# Altium PCB kardio (1).pcbdoc
Units mm, origin at the board's own origin, x right, y up, seen from the top; angles counter-clockwise.
Board outline 75 x 75 mm, 2 copper layers (Top Layer, Bottom Layer); 36 components, 33 nets, 151 pads, 22 vias.
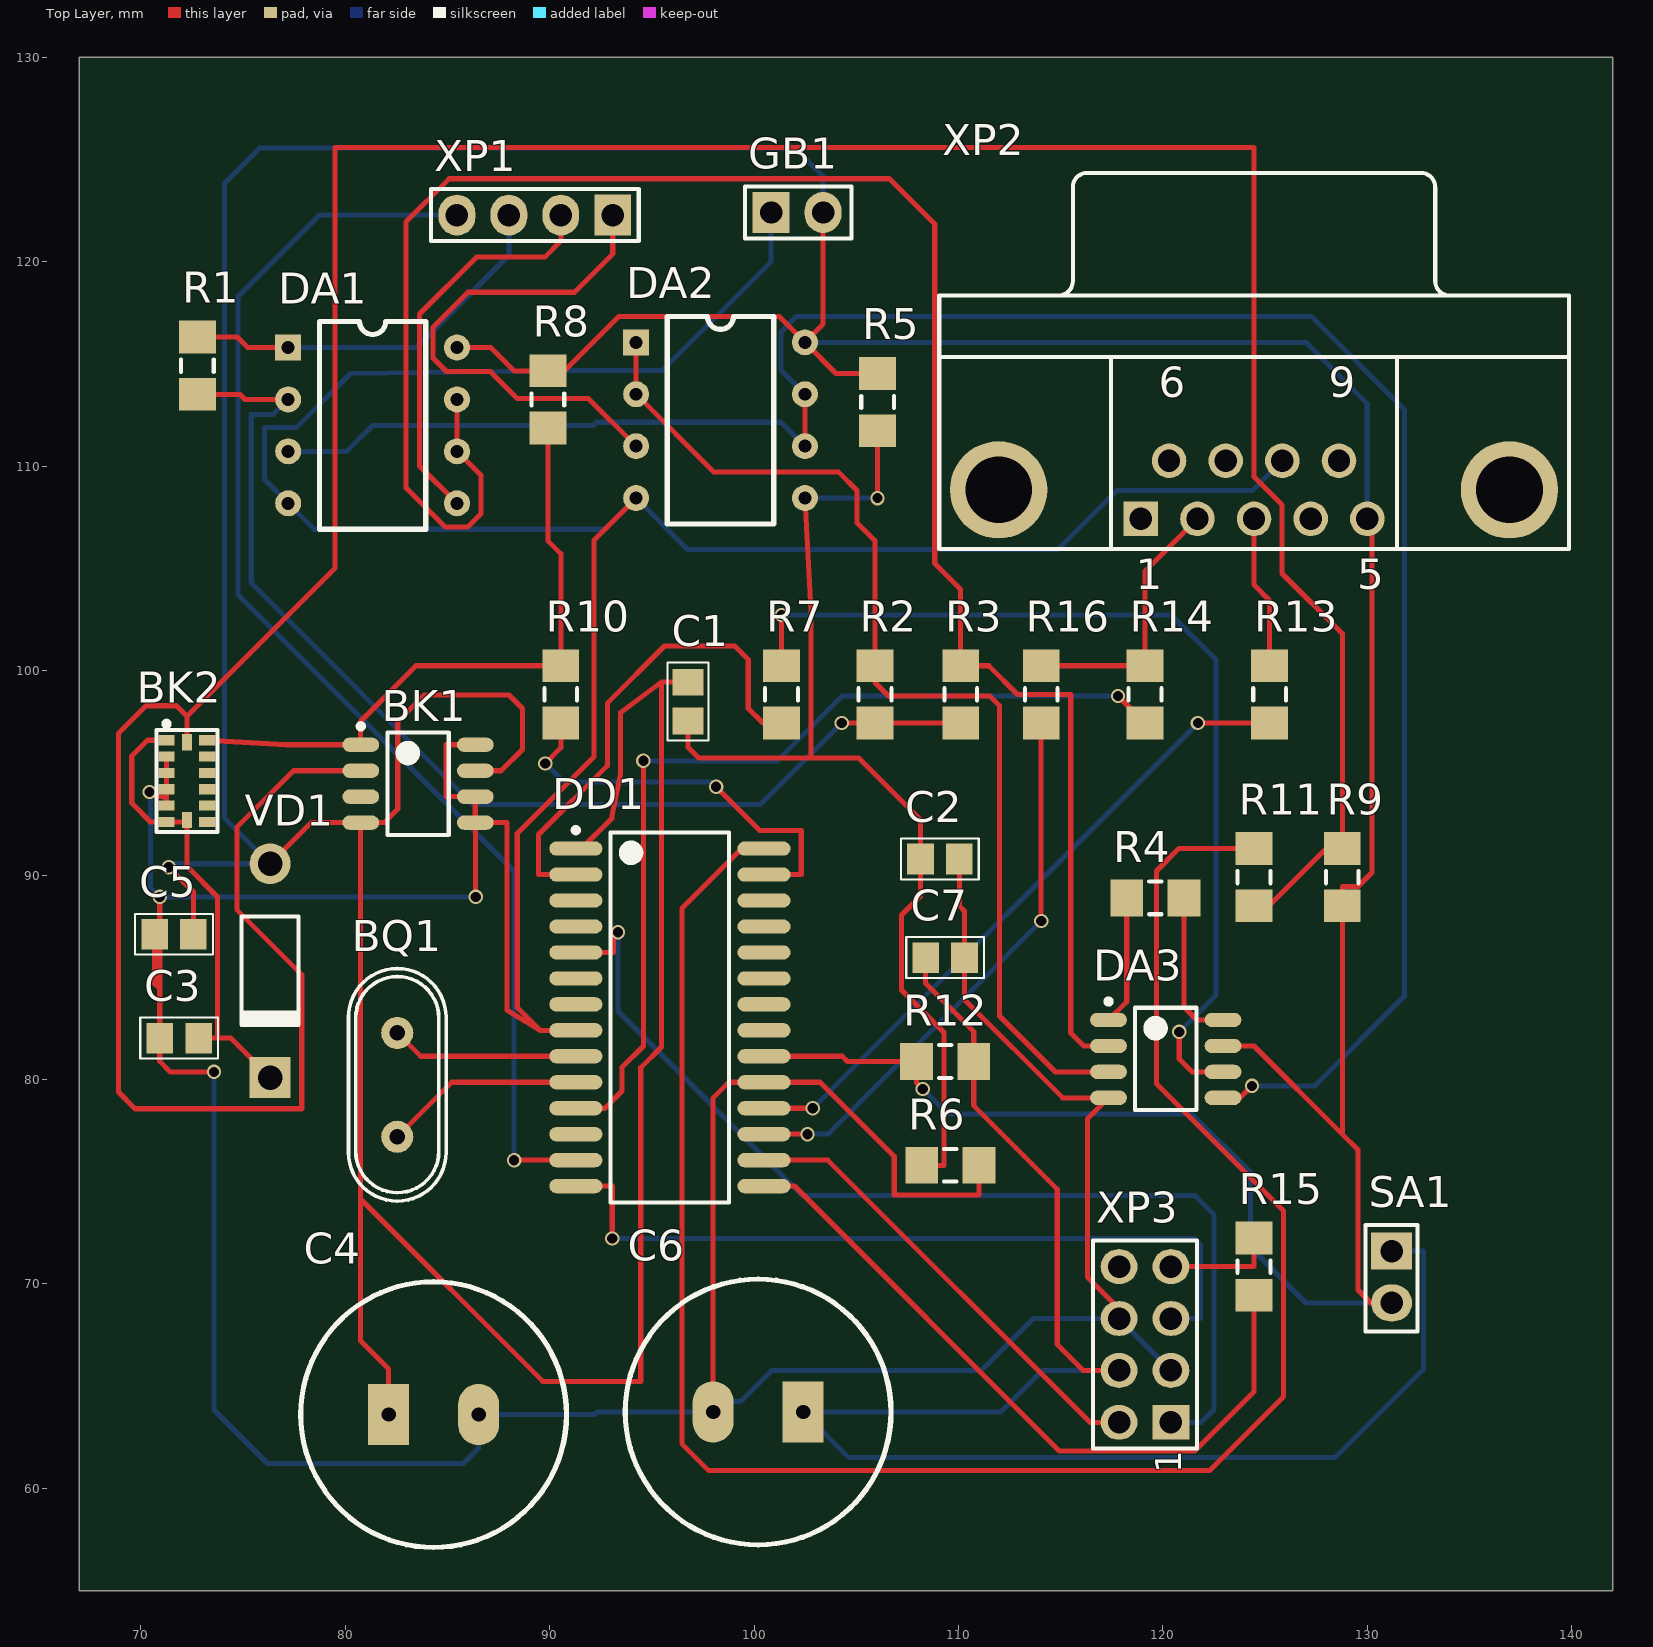
[diagram p0: Top Layer view]
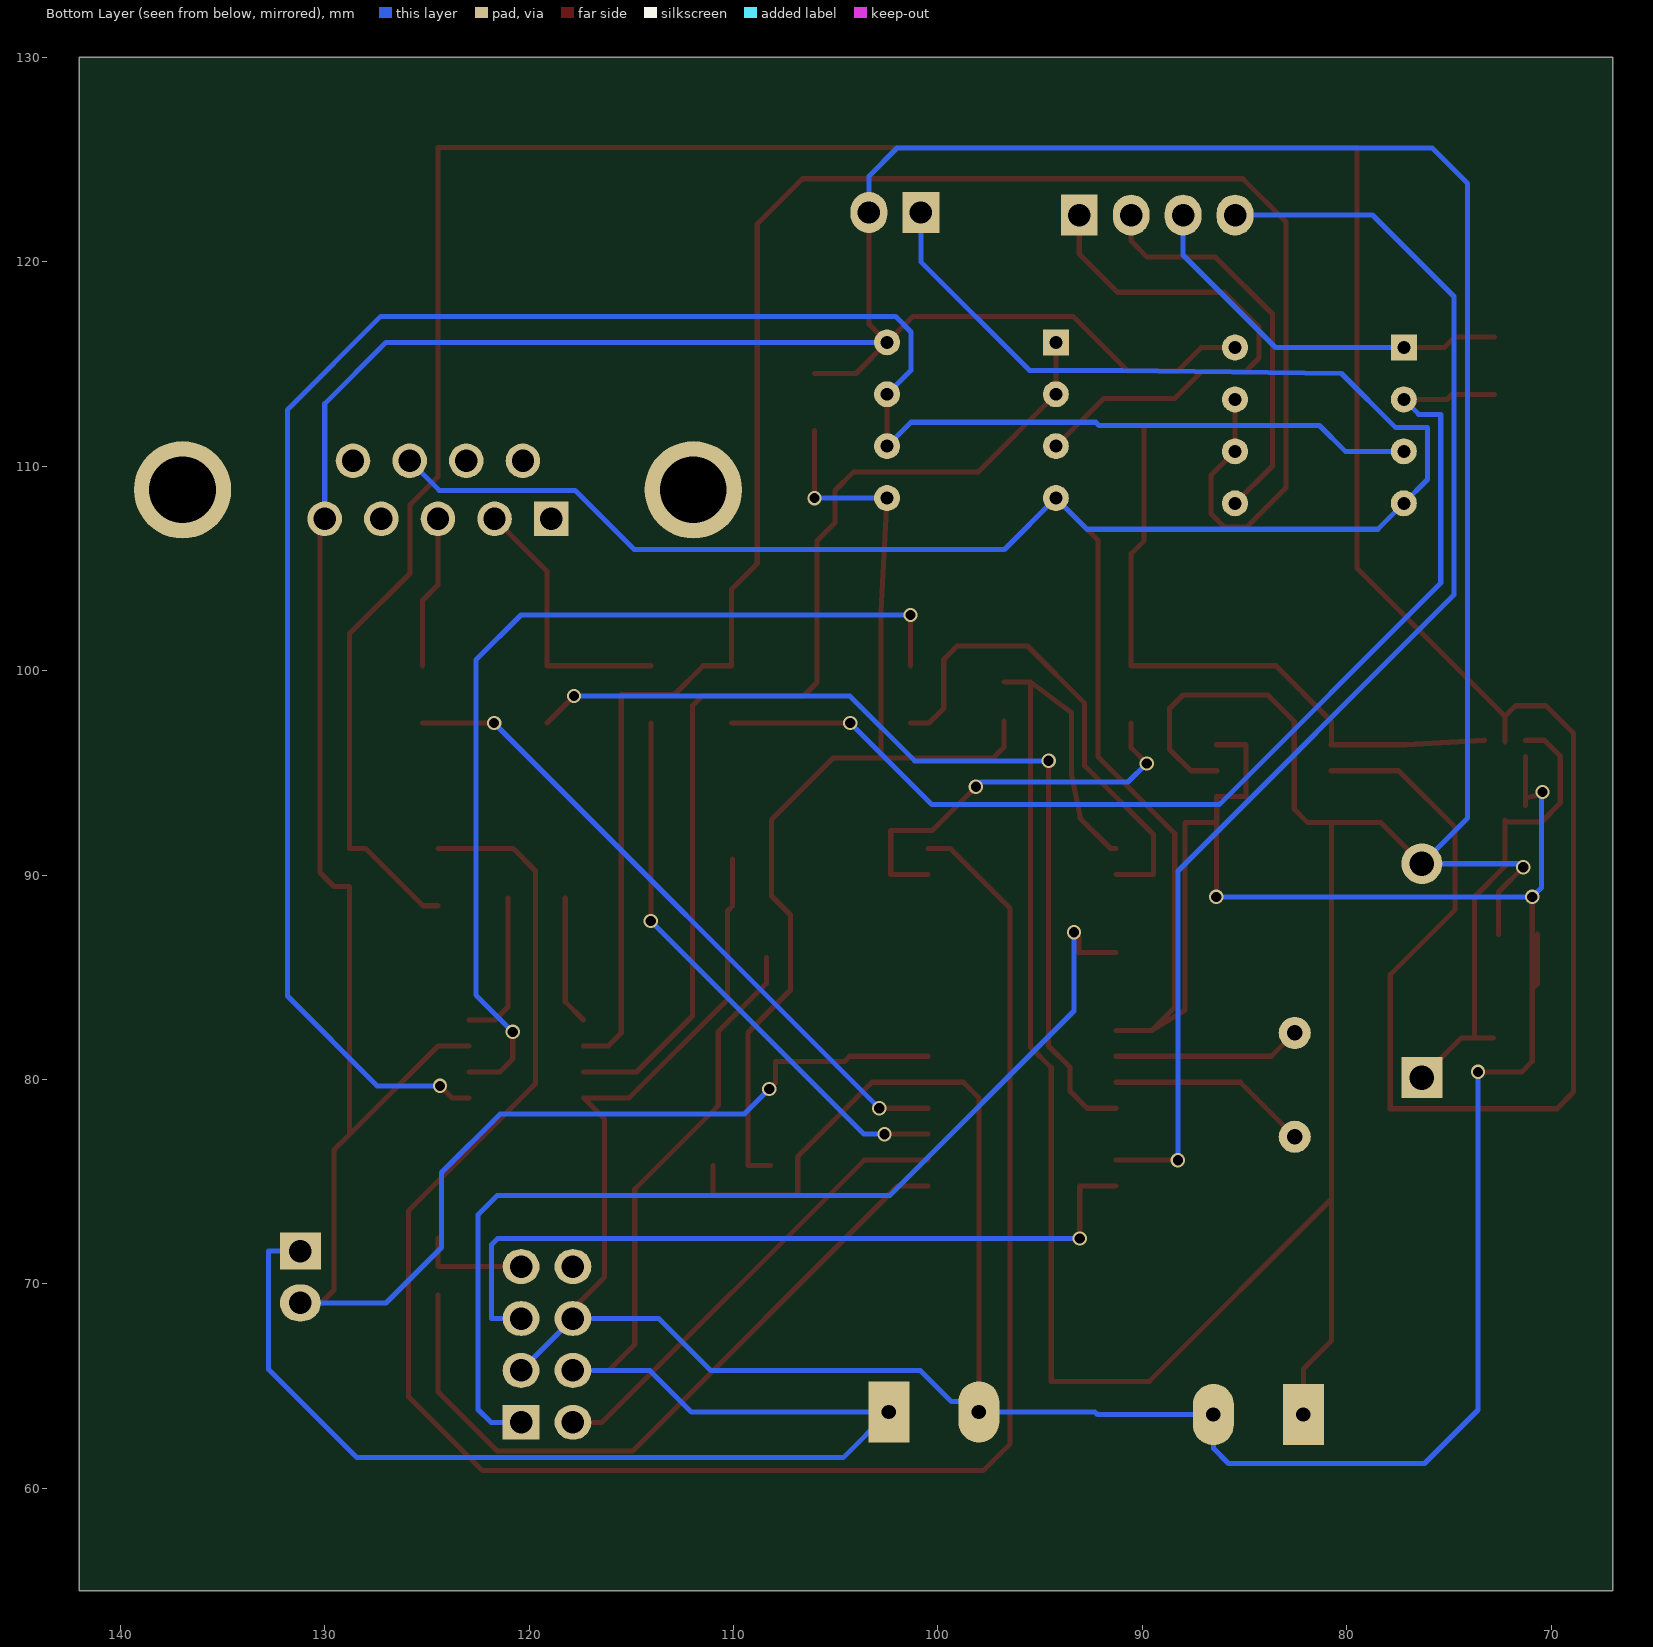
[diagram p1: Bottom Layer view, seen from below]

## Layer stack, top to bottom
Top Layer: signal copper 0.0356
Dielectric: dielectric 0.32, FR-4, Dk 4.8
Bottom Layer: signal copper 0.0356

## Board outline
67,55 142,55 142,130 67,130

## Design rules (kind name [scope] priority, off if disabled: settings)
Clearance [All] p1: gap=0.4
PolygonConnect [All] p1: connectstyle=Relief reliefconductorwidth=0.254 reliefentries=4 polygonreliefangle="90 Angle" airgapwidth=0.254
RoutingCorners [All] p1: cornerstyle=Round minsetback=0.2 maxsetback=2.54
RoutingVias [All] p1: holewidth=0.5 width=0.7 viastyle="Through Hole" minholewidth=0.5 minwidth=0.7 maxholewidth=0.711 maxwidth=1.27
SolderMaskExpansion [All] p1: expansion=0.102
Width [All] p1: maxlimit=0.25 minlimit=0.25 preferedwidth=0.25
27 further rules are at their usual default settings.

## Components (designator, comment, footprint, x,y, rotation, side; value= is the part's Value field where it differs from the comment)
BK1 "DS1621" SOIC-8CM 83.566,94.472 r0 top
BK2 "MMA7455LT" SOJ80P300X0-12M 72.263,94.599 r0 top
BQ1 "10МГц" HC49S 82.55,79.74 r90 top
C1 "0.22мк" C0805 96.774,98.489 r90 top
C2 "0.22мк" C0805 109.093,90.789 r180 top
C3 "0.1мк" C0805 71.882,82.026 r180 top
C4 "1000мк" "LZ 12x26 1000 мкФ x 25 В" 84.328,63.611 r0 top
C5 "0.1мк" C0805 71.628,87.106 r180 top
C6 "1000мк" "LZ 12x26 1000 мкФ x 25 В" 100.203,63.738 r180 top
C7 "0.1мк" C0805 109.347,85.963 r0 top
DA1 "КР1446УД1" PDIP8 77.216,115.808 r0 top
DA2 "КР1446УД1" PDIP8 94.234,116.062 r0 top
DA3 "AD623" SOIC-8CM 120.142,81.01 r0 top
DD1 "PIC16F873A" SOIC-SO28_M 95.885,83.042 r0 top
GB1 "3.6B" Button 104.521,123.428 r0 top
R1 "720К" 1206 72.771,114.919 r270 top
R2 "20К" 1206 105.918,98.841 r90 top
R3 "20К" 1206 110.109,98.841 r90 top
R4 "20К" 1206 119.634,88.884 r180 top
R5 "150К" 1206 106.045,113.141 r90 top
R6 "150К" 1206 109.601,75.803 r180 top
R7 "300" 1206 101.346,98.841 r270 top
R8 "4К7" 1206 89.916,113.268 r270 top
R9 "4К7" 1206 128.778,89.9 r90 top
R10 "300" 1206 90.551,98.841 r270 top
R11 "300" 1206 124.46,89.9 r90 top
R12 "10" 1206 109.347,80.883 r0 top
R13 "300" 1206 125.222,98.841 r90 top
R14 "300" 1206 119.126,98.841 r90 top
R15 "300" 1206 124.46,70.85 r90 top
R16 "300" 1206 114.046,98.841 r90 top
SA1 "Button" Button 132.207,67.929 r270 top
VD1 "КД522" DO-41 76.327,85.328 r270 top
XP1 "INPUT" "HDR1X4 - WA" 93.091,122.285 r180 top
XP2 "COM-port" COM-port 124.46,118.348 r0 top
XP3 "SD-card" "HDR2X4 - wide area" 120.396,63.23 r90 top

## Footprints (in the part's own frame and the unit in brackets; to place one, negate y for a bottom-side part, rotate by r counter-clockwise, add the part's x,y. Pads: shape width x height; smd on the part's side, far side on the other; paste and mask are expansions set on the pad)
1206 [mm] "Chip Resistor; Body 3.1 x 1.6 mm (LxW typ)"
  rect 1.6x1.8 smd: 1(-1.4,0) 2(1.4,0)
  silkscreen extent -0.3,-0.8 0.3,0.8
Button [mm]
  rect 1.8x2 hole 1.1: 1(-3.683,-1.016)
  oval 1.8x2 hole 1.1: 2(-1.143,-1.016)
  silkscreen extent -4.95,-2.29 0.25,0.25
C0805 [mm] "Chip Capacitor; Body 2.0 x 1.2 mm (LxW typ)"
  rect 1.3x1.5 smd: 1(-0.95,0) 2(0.95,0)
  silkscreen extent -1.9,-1 1.91,1
COM-port [mm] "Connector; D Subminiature AMPLIMITE 2000; 9 Position; Right Angle"
  rect 1.69x1.69 hole 1.09: 1(-5.54,-10.92)
  round 1.69 hole 1.09: 2(-2.77,-10.92) 3(0,-10.92) 4(2.77,-10.92) 5(5.54,-10.92) 6(-4.155,-8.08) 7(-1.385,-8.08) 8(1.385,-8.08) 9(4.155,-8.08)
  round 4.76 hole 3.26: 10(-12.495,-9.5) 11(12.495,-9.5)
  silkscreen extent -15.4,-12.4 15.4,6, body extent -15.4,-12.4 15.4,6, height 12.75
DO-41 [mm] "Diode, Axial; Body 5.2 x 2.7 mm (LxDia. max), Lead Dia. 0.86 mm (max)"
  round 2 hole 1.2: 1(-5.23,0)
  rect 2x2 hole 1.2: 2(5.23,0)
  silkscreen extent -2.65,-1.4 2.75,1.4
HC49S [mil]
  round 62 hole 30: 1(-100,0) 2(100,0)
  silkscreen extent -224,-94 224,94
"HDR1X4 - WA" [mm] "Разъем двухрядный, шаг 2,54 мм."
  rect 1.8x2 hole 1.1: 1(0,0)
  oval 1.8x2 hole 1.1: 2(2.54,0) 3(5.08,0) 4(7.62,0)
  silkscreen extent -1.27,-1.27 8.89,1.27
"HDR2X4 - wide area" [mm] "Connector; Header; 4x2 Position"
  rect 1.7x1.8 hole 1.1: 1(0,0)
  oval 1.7x1.8 hole 1.1: 2(0,2.54) 3(2.54,0) 4(2.54,2.54) 5(5.08,0) 6(5.08,2.54) 7(7.62,0) 8(7.62,2.54)
  silkscreen extent -1.27,-1.27 8.89,3.81
"LZ 12x26 1000 мкФ x 25 В" [mm] "D=12.0 d=0.7 S=4.4"
  rect 2x3 hole 0.7: 1(-2.2,0)
  oval 2x3 hole 0.7: 2(2.2,0)
  silkscreen extent -6.5,-6.5 6.5,6.5
PDIP8 [mm]
  rect 1.27x1.27 hole 0.635: 1(0,0)
  round 1.27 hole 0.635: 2(0,-2.54) 3(0,-5.08) 4(0,-7.62) 5(8.255,-7.62) 6(8.255,-5.08) 7(8.255,-2.54) 8(8.255,0)
  silkscreen extent 1.52,-8.89 6.73,1.27
SOIC-8CM [mm] "SOIC, 8-Leads, Body 4.9x3.9mm, Pitch 1.27mm, IPC Low Density"
  oval 1.8x0.7 smd: 1(-2.8,1.905) 2(-2.8,0.635) 3(-2.8,-0.635) 4(-2.8,-1.905) 5(2.8,-1.905) 6(2.8,-0.635) 7(2.8,0.635) 8(2.8,1.905)
  silkscreen extent -2.92,-2.5 1.5,2.93, body extent -2,-2.5 2,2.5, height 1.73
SOIC-SO28_M [mm] "SOIC, 28-Leads, Body 17.9x7.5mm, Pitch 1.27mm, IPC Low Density"
  oval 2.6x0.7 smd: 1(-4.6,8.255) 2(-4.6,6.985) 3(-4.6,5.715) 4(-4.6,4.445) 5(-4.6,3.175) 6(-4.6,1.905) 7(-4.6,0.635) 8(-4.6,-0.635) 9(-4.6,-1.905) 10(-4.6,-3.175) 11(-4.6,-4.445) 12(-4.6,-5.715) 13(-4.6,-6.985) 14(-4.6,-8.255) 15(4.6,-8.255) 16(4.6,-6.985) 17(4.6,-5.715) 18(4.6,-4.445) 19(4.6,-3.175) 20(4.6,-1.905) 21(4.6,-0.635) 22(4.6,0.635) 23(4.6,1.905) 24(4.6,3.175) 25(4.6,4.445) 26(4.6,5.715) 27(4.6,6.985) 28(4.6,8.255)
  silkscreen extent -4.72,-9.05 2.9,9.28, body extent -3.8,-9.06 3.8,9.06, height 2.65
SOJ80P300X0-12M [mm] "SOJ, 12-Leads, Body 5,00x3,00mm, Pitch 0,80mm, IPC Low Density"
  rect 0.8x0.5 smd: 1(-1,2) 2(-1,1.2) 3(-1,0.4) 4(-1,-0.4) 5(-1,-1.2) 6(-1,-2) 8(1,-2) 9(1,-1.2) 10(1,-0.4) 11(1,0.4) 12(1,1.2) 13(1,2)
  rect 0.5x0.8 smd: 7(0,-1.905) 14(0,1.905)
  silkscreen extent -1.5,-2.5 1.5,2.92, body extent -1.5,-2.5 1.5,2.5, height 0.01

## Part data
BK1: "Temperature sensor"
BK2: "Digital Output Accelerometer"
BQ1: library part "Cristal Oscilator"
C1 C2 C3 C5 C7: library part Capasitior
C4 C6: library part "Capasitor electrolit"
DA3: "Amplifier"
DD1: library part PIC16F873A-I/SO, "Enhanced FLASH Microcontroller, 4K (x14-Bit words) FLASH, 192 Bytes RAM, 28-Pin SOIC, Standard VDD Range, Industrial Temperature"
GB1: library part Batery
R1 R2 R3 R4 R5 R6 R7 R8 R9 R10 R11 R12 R13 R14 R15 R16: library part Resistor

## Via types
v1: diameter 0.7, hole 0.5, Top Layer to Bottom Layer, 22 vias

## Nets (pads, with @x,y where several pads share a name; then routed paths per layer and width w, separated by ;. In a path a pad name is that pad's centre, name@x,y a point inside that pad or via, vN(x,y) a via of type N, cw(c..) or ccw(c..) an arc to the next point about the centre after c; other vN are vias at no path point)
3.6В: BK1.4 BK1.7 C1.2 C4.1 C5.1 DA1.8 DA2.8 DA3.7 DD1.1 DD1.20 GB1.2 R5.2 R8.1 R9.1 R12.1 SA1.2 VD1.1 XP2.5 | length 343.3
  Top Layer w0.25: v1(71.374,90.383) 72.578,89.179 C5.1 ; VD1.1 78.336,92.567 BK1.4@80.747,92.567 ; C4.1 82.128,65.846 80.747,67.228 80.747,74.152 ; DA1.8 87.122,115.808 88.262,114.668 R8.1 90.732,114.668 93.396,117.332 101.219,117.332 DA2.8 ; BK1.7 87.63,95.107 88.671,96.148 88.671,98.155 88.011,98.815 83.871,98.815 82.575,97.52 82.575,93.227 81.915,92.567 BK1.4 BK1.4@80.747,92.567 ; DD1.1 91.567,91.297 93.04,92.77 93.477,94.929 93.477,97.956 95.479,99.439 ; C1.2 95.479,99.439 ; DD1.20 104.318,81.137 104.572,80.883 R12.1 107.947,79.845 v1(108.255,79.537) ; GB1.2 103.378,116.951 DA2.8 ; R5.2 104.01,114.541 DA2.8 ; DA3.7 124.46,81.645 128.778,77.327 ; XP2.5 130.226,107.428 130.226,90.129 129.54,89.443 128.778,89.443 R9.1 128.778,77.327 ; SA1.2 130.175,69.072 129.54,69.707 129.54,76.565 128.778,77.327 ; 80.747,74.152 BK1.4@80.747,92.567 ; 80.747,74.152 89.662,65.237 94.463,65.237 94.463,80.578 95.479,81.594 95.479,99.439
  Bottom Layer w0.25: v1(71.374,90.383) 71.549,90.558 VD1.1 74.092,92.793 74.092,123.834 75.819,125.562 102.006,125.562 103.378,124.19 GB1.2 ; DA2.8 127,116.062 130,113.062 XP2.5 ; v1(108.255,79.537) 109.474,78.318 121.412,78.318 124.282,75.447 124.282,71.79 127,69.072 SA1.2
CS: DD1.5 XP3.1 | length 52
  Top Layer w0.25: DD1.5 93.116,86.217 93.116,86.979 v1(93.345,87.208)
  Bottom Layer w0.25: v1(93.345,87.208) 93.345,83.347 102.362,74.33 121.564,74.33 122.504,73.39 122.504,63.865 121.869,63.23 XP3.1
GND: BK1.5 BK1.6 BK1.8 BK2.2 BK2.3 BK2.4 BK2.5 C2.1 C3.2 C4.2 C5.2 C6.2 C7.2 DA1.4 DA2.4 DA3.4 DD1.8 DD1.19 GB1.1 R6.1 XP2.8 XP3.3 XP3.6 | length 309.7
  Top Layer w0.25: v1(70.434,94.066) 70.587,93.913 71.188,93.8 71.263,93.786 ; C5.2 70.678,84.693 70.932,84.439 ; v1(70.932,88.935) 70.932,87.106 70.932,84.439 ; BK2.5 71.263,93.786 ; BK2.2 BK2.3 BK2.4 71.263,93.786 ; v1(73.584,80.375) 71.45,80.375 70.932,80.893 C3.2 70.932,84.439 ; BK1.8 84.938,96.377 84.938,93.837 BK1.6 BK1.5 BK1.5@86.385,92.567 ; v1(86.385,88.935) BK1.5@86.385,92.567 ; DD1.8 89.535,82.407 ; DA2.4 92.177,106.385 92.177,95.793 88.417,92.034 88.417,83.525 89.535,82.407 ; C6.2 98.003,79.105 98.765,79.867 DD1.19 103.226,79.867 106.858,76.235 106.858,74.355 111.001,74.355 R6.1 ; C2.1 110.043,88.503 110.297,88.249 C7.2 110.297,83.906 115.098,79.105 DA3.4 116.307,78.07 116.307,70.342 117.856,68.793 XP3.6 ; BK1.5@86.385,92.567 87.909,92.567 87.909,83.398 89.535,82.407
  Bottom Layer w0.25: v1(70.434,94.066) 70.485,94.015 70.485,89.382 v1(70.932,88.935) v1(86.385,88.935) ; v1(73.584,80.375) 73.584,63.84 76.2,61.223 85.791,61.223 86.528,61.96 C4.2 92.202,63.611 92.329,63.738 C6.2 98.003,64.246 99.346,64.246 100.863,65.763 111.118,65.763 113.665,68.31 XP3.6 XP3.3 ; GB1.1 100.838,119.999 95.529,114.69 91.008,114.69 80.264,114.538 77.614,111.888 76.056,111.888 76.056,109.348 DA1.4 78.486,106.918 92.71,106.918 DA2.4 96.749,105.927 114.859,105.927 117.754,108.823 124.4,108.823 XP2.8
IN: DD1.13 XP1.4 | length 63.2
  Top Layer w0.25: v1(88.265,76.057) DD1.13
  Bottom Layer w0.25: XP1.4 78.74,122.285 74.756,118.301 74.756,103.714 88.265,90.205 v1(88.265,76.057)
NetBK1_1: BK1.1 BK2.13 R8.2 R10.1 | length 31.5
  Top Layer w0.25: BK2.13 77.108,96.377 BK1.1@80.747,96.377 ; BK1.1 BK1.1@80.747,96.377 ; R8.2 89.916,106.359 90.551,105.724 R10.1 83.467,100.241 80.747,97.52 BK1.1@80.747,96.377
NetBK1_2: BK1.2 BK2.14 R9.2 R11.1 | length 171.9
  Top Layer w0.25: BK2.14 72.263,97.774 ; BK1.2 77.47,95.107 74.701,92.338 74.701,88.3 77.876,85.125 77.876,78.572 69.723,78.572 68.909,79.385 68.909,96.935 70.256,98.282 71.755,98.282 72.263,97.774 ; R11.1 125.197,88.5 127.997,91.3 R9.2 128.778,101.813 125.832,104.759 125.832,108.112 124.46,109.483 124.46,125.587 79.502,125.587 79.502,105.013 72.263,97.774
NetBK2_1: BK2.1 BK2.6 BK2.7 C3.1 VD1.2 | length 23
  Top Layer w0.25: BK2.1 70.333,96.599 69.559,95.826 69.559,93.525 70.485,92.599 BK2.6 BK2.7@72.263,92.599 ; BK2.7 BK2.7@72.263,92.599 ; C3.1 73.762,82.026 ; VD1.2 74.399,82.026 73.762,82.026 ; BK2.7@72.263,92.599 72.263,90.433 73.762,88.935 73.762,82.026
NetBQ1_1: BQ1.1 DD1.10 | length 9.8
  Top Layer w0.25: BQ1.1 85.217,79.867 DD1.10
NetBQ1_2: BQ1.2 DD1.9 | length 9.2
  Top Layer w0.25: BQ1.2 83.693,81.137 DD1.9
NetC1_1: C1.1 C2.2 DA2.5 R5.1 R6.2 | length 53
  Top Layer w0.25: C1.1 96.774,96.25 97.301,95.723 102.794,95.723 ; DA2.5 102.794,102.879 102.794,95.723 ; v1(106.045,108.442) R5.1 ; R6.2 109.296,75.803 109.296,82.301 107.213,84.384 107.213,88.046 108.143,88.975 C2.2 108.143,92.704 105.124,95.723 102.794,95.723
  Bottom Layer w0.25: DA2.5 v1(106.045,108.442)
NetDA1_1: DA1.1 R1.1 XP1.3 | length 19.3
  Top Layer w0.25: R1.1 74.727,116.319 75.238,115.808 DA1.1
  Bottom Layer w0.25: DA1.1 83.49,115.808 88.011,120.329 XP1.3
NetDA1_2: DA1.2 R1.2 R2.1 R3.1 | length 55.8
  Top Layer w0.25: R1.2 74.854,113.519 75.105,113.268 DA1.2 ; v1(104.292,97.441) R2.1 R3.1
  Bottom Layer w0.25: DA1.2 76.486,112.538 75.406,112.538 75.406,104.283 86.244,93.445 100.296,93.445 v1(104.292,97.441)
NetDA1_3: DA1.3 DA2.6 DA2.7 DA3.5 | length 104.8
  Top Layer w0.25: DA2.6 DA2.7 ; DA3.5 123.774,79.105 v1(124.358,79.689)
  Bottom Layer w0.25: DA1.3 80.073,110.728 81.343,111.998 92.126,111.998 92.278,112.15 101.321,112.15 DA2.6 ; DA2.7 101.321,114.69 101.321,116.57 102.083,117.332 127.254,117.332 131.826,112.76 131.826,84.083 127.432,79.689 v1(124.358,79.689)
NetDA1_5: DA1.5 XP1.2 | length 19.7
  Top Layer w0.25: DA1.5 83.642,110.017 83.642,117.449 86.421,120.228 89.764,120.228 90.551,121.015 XP1.2
NetDA1_6: DA1.6 DA1.7 DA3.2 R3.2 | length 98.2
  Top Layer w0.25: DA1.7 DA1.6 86.639,109.56 86.639,107.68 85.979,107.02 84.912,107.02 82.982,108.95 82.982,121.955 85.09,124.063 106.629,124.063 108.839,121.853 108.839,105.242 110.109,103.972 R3.2 111.488,100.241 112.888,98.841 115.494,98.841 115.494,82.28 116.129,81.645 DA3.2
NetDA2_1: DA2.1 DA2.2 DA3.3 R2.2 | length 53.3
  Top Layer w0.25: DA2.1 DA2.2 98.044,109.712 104.14,109.712 105.044,108.808 105.044,107.234 105.918,106.361 R2.2 105.918,99.425 106.577,98.766 111.531,98.766 112.014,98.283 112.014,83.108 114.747,80.375 DA3.3
NetDA2_3: DA2.3 XP1.1 | length 25.4
  Top Layer w0.25: XP1.1 93.091,120.38 91.222,118.511 86.015,118.511 84.303,116.799 84.303,115.3 84.963,114.64 87.097,114.64 88.417,113.319 91.897,113.319 DA2.3
NetDA3_1: DA3.1 R4.2 | length 6.3
  Top Layer w0.25: DA3.1 118.234,83.807 R4.2
NetDA3_6: DA3.6 R7.1 | length 47.3
  Top Layer w0.25: R7.1 v1(101.346,102.727) ; v1(120.802,82.331) 120.802,81.01 121.437,80.375 DA3.6
  Bottom Layer w0.25: v1(101.346,102.727) 120.396,102.727 122.606,100.517 122.606,84.134 v1(120.802,82.331)
NetDA3_8: DA3.8 R4.1 | length 7.5
  Top Layer w0.25: R4.1 121.034,83.55 121.669,82.915 DA3.8
NetDD1_2: DD1.2 R7.2 | length 24.2
  Top Layer w0.25: DD1.2 89.459,90.027 89.459,91.983 92.827,95.351 92.827,98.409 95.621,101.203 99.06,101.203 99.72,100.543 99.72,98.155 100.435,97.441 R7.2
NetDD1_11: DD1.11 R14.1 | length 45.6
  Top Layer w0.25: DD1.11 92.71,78.597 93.548,79.435 93.548,80.604 94.59,81.645 v1(94.59,95.59) ; v1(117.805,98.765) 119.126,97.444 R14.1
  Bottom Layer w0.25: v1(94.59,95.59) 101.143,95.59 104.318,98.765 v1(117.805,98.765)
NetDD1_15: DD1.15 R15.1 | length 35.3
  Top Layer w0.25: DD1.15 101.981,74.787 114.935,61.833 121.564,61.833 124.46,64.729 R15.1
NetDD1_17: DD1.17 R16.1 | length 27.6
  Top Layer w0.25: DD1.17 v1(102.616,77.327) ; v1(114.046,87.758) R16.1
  Bottom Layer w0.25: v1(102.616,77.327) 103.615,77.327 v1(114.046,87.758)
NetDD1_18: DD1.18 R13.1 | length 32.5
  Top Layer w0.25: DD1.18 v1(102.87,78.597) ; v1(121.714,97.441) R13.1
  Bottom Layer w0.25: v1(102.87,78.597) v1(121.714,97.441)
NetDD1_27: DD1.27 R10.2 | length 20.2
  Top Layer w0.25: v1(89.789,95.463) 90.551,96.225 R10.2 ; v1(98.146,94.32) 100.279,92.186 102.311,92.186 102.311,90.027 DD1.27
  Bottom Layer w0.25: v1(89.789,95.463) 90.703,94.548 97.917,94.548 v1(98.146,94.32)
NetDD1_28: DD1.28 R11.2 | length 96.4
  Top Layer w0.25: DD1.28 99.405,91.297 96.469,88.361 96.469,62.189 97.79,60.868 122.276,60.868 125.908,64.5 125.908,73.568 119.685,79.791 119.685,90.205 120.78,91.3 R11.2
RX: R13.2 XP2.3 | length 7.5
  Top Layer w0.25: XP2.3 124.46,104.2 125.222,103.438 R13.2
SCK: DD1.14 XP3.5 | length 38.3
  Top Layer w0.25: DD1.14 93.066,74.787 v1(93.066,72.225)
  Bottom Layer w0.25: v1(93.066,72.225) 121.539,72.225 121.844,71.92 121.844,68.31 XP3.5
SDI: R15.2 XP3.7 | length 5.5
  Top Layer w0.25: XP3.7 124.46,70.85 R15.2
SDO: DD1.16 XP3.2 | length 22.7
  Top Layer w0.25: DD1.16 103.605,76.057 116.432,63.23 XP3.2
TX: R14.2 R16.2 XP2.2 | length 13.3
  Top Layer w0.25: R16.2 R14.2 119.126,104.864 XP2.2
VDD: C6.1 C7.1 R12.2 SA1.1 XP3.4 | length 81.8
  Top Layer w0.25: C7.1 108.397,84.703 110.747,82.353 R12.2 110.747,78.721 114.833,74.635 114.833,67.04 116.103,65.77 XP3.4
  Bottom Layer w0.25: XP3.4 114.097,65.77 112.065,63.738 C6.1 104.638,61.503 128.422,61.503 132.74,65.821 132.74,71.612 SA1.1
pads on no net: BK1.3 BK2.8 BK2.9 BK2.10 BK2.11 BK2.12 DD1.3 DD1.4 DD1.6 DD1.7 DD1.12 DD1.21 DD1.22 DD1.23 DD1.24 DD1.25 DD1.26 XP2.1 XP2.4 XP2.6 XP2.7 XP2.9 XP2.10 XP2.11 XP3.8

## Text inside footprints (layer, text, board x,y; h text height)
XP2: Top Overlay "6" at 119.805,113.373 h1.5; Top Overlay "9" at 128.115,113.373 h1.5; Top Overlay "5" at 129.5,103.973 h1.5; Top Overlay "1" at 118.67,103.973 h1.5
XP3: Top Overlay "1" at 120.896,60.73 h1.27 r90